# EAGLE board rs232 (EAGLE 4.16)

Size 160 x 100 mm. Coordinates in mm from the lower left corner, seen from the top.
Outline: 0,0 160,0 160,100 0,100 0,0
Copper layers (1*16): Top 0.035mm / dielectric 1.5mm / Bottom 0.035mm
Design rules "default": minimum track width 10mil, minimum drill 24mil, track to track 8mil, track to pad 8mil, pad to pad 8mil, via to via 8mil, smd to smd 8mil, copper to edge 40mil, drill to drill 8mil, minimum pad ring 10mil, minimum via ring 8mil, stop-mask expansion 4mil, vias tented up to drill 0mil, thermal gap 10mil

## Footprints (pad centres in the part's own frame; a part is rotated, then mirrored left to right if it is on the bottom)
C0805K = smd 1.3 x 1.6: 1 -1,0; 2 1,0
PANASONIC_B = smd 2.2 x 1.4: + 1.6,0; - -1.6,0
SO16 = smd 0.66 x 2.032: 1 -4.445,-3.073; 2 -3.175,-3.073; 3 -1.905,-3.073; 4 -0.635,-3.073; 5 0.635,-3.073; 6 1.905,-3.073; 7 3.175,-3.073; 8 4.445,-3.073; 9 4.445,3.073; 10 3.175,3.073; 11 1.905,3.073; 12 0.635,3.073; 13 -0.635,3.073; 14 -1.905,3.073; 15 -3.175,3.073; 16 -4.445,3.073
TQFP32-08 = smd 1.27 x 0.559: 1 -4.293,2.8; 2 -4.293,2; 3 -4.293,1.2; 4 -4.293,0.4; 5 -4.293,-0.4; 6 -4.293,-1.2; 7 -4.293,-2; 8 -4.293,-2.8; 17 4.293,-2.8; 18 4.293,-2; 19 4.293,-1.2; 20 4.293,-0.4; 21 4.293,0.4; 22 4.293,1.2; 23 4.293,2; 24 4.293,2.8 | smd 0.559 x 1.27: 9 -2.8,-4.293; 10 -2,-4.293; 11 -1.2,-4.293; 12 -0.4,-4.293; 13 0.4,-4.293; 14 1.2,-4.293; 15 2,-4.293; 16 2.8,-4.293; 25 2.8,4.293; 26 2,4.293; 27 1.2,4.293; 28 0.4,4.293; 29 -0.4,4.293; 30 -1.2,4.293; 31 -2,4.293; 32 -2.8,4.293
SO-08 = smd 0.6 x 2.2: 1 -1.905,-2.6; 2 -0.635,-2.6; 3 0.635,-2.6; 4 1.905,-2.6; 5 1.905,2.6; 6 0.635,2.6; 7 -0.635,2.6; 8 -1.905,2.6
LED3MM = drill 0.813 octagon: A -1.27,0; K 1.27,0
D_SUB_DON_SMD = smd 1.3 x 2.2: 1 10.26,-2.308; 2 7.52,-2.318; 3 4.78,-2.318; 4 2.04,-2.318; 5 -0.7,-2.318; 6 8.88,1.102; 7 6.14,1.102; 8 3.4,1.102; 9 0.66,1.102 | drill 2.2 round: P$1 -3.5,1.21 | drill 1.7 round: P$2 13.11,1.09
USB_4POL_PCB_FEMALE = drill 0.95 round: 1 0.03,2.69; 2 2.04,2.71; 3 4.06,2.69; 4 6.07,2.71 | hole 2.3: -2.16,0; 8.26,-0.07
MURATA_RESONATOR = smd 0.8 x 2.6: 1 -1.5,0; 2 0,0; 3 1.5,0
R0603 = smd 1 x 1.1: 1 -0.85,0; 2 0.85,0
TESTPAD = drill 1.321 pad 2.159 octagon: 1 0,0

## Placement (x,y rotation side)
C1  100n  [C0805K]  -62.87,89.37 0 top  (outside the outline)
C2  100n  [C0805K]  -73.03,89.37 0 top  (outside the outline)
C3  100n  [C0805K]  -83.19,89.37 0 top  (outside the outline)
C4  100n  [C0805K]  -93.35,89.37 0 top  (outside the outline)
C5  100n  [C0805K]  -103.51,89.37 0 top  (outside the outline)
C6  33n  [C0805K]  -113.67,89.37 0 top  (outside the outline)
C7  100n  [C0805K]  -123.83,89.37 0 top  (outside the outline)
C8  10u/16V  [PANASONIC_B]  -29.85,79.21 0 top  (outside the outline)
C9  100n  [C0805K]  -133.99,89.37 0 top  (outside the outline)
IC1  MAX232A  [SO16]  -85.73,8.09 0 top  (outside the outline)
IC2  FT232BL  [TQFP32-08]  -38.74,8.09 0 top  (outside the outline)
IC3  93LC66SN  [SO-08]  -144.15,69.05 0 top  (outside the outline)
LED1  [LED3MM]  -73.03,79.21 0 top  (outside the outline)
LED2  [LED3MM]  -45.09,79.21 0 top  (outside the outline)
LED3  [LED3MM]  -59.06,79.21 0 top  (outside the outline)
P1  D_SUB_9PIN_SMD  [D_SUB_DON_SMD]  -66.68,6.82 0 top  (outside the outline)
P3  [USB_4POL_PCB_FEMALE]  -24.77,11.9 0 top  (outside the outline)
Q1  [MURATA_RESONATOR]  -142.88,-5.88 0 top  (outside the outline)
R1  220R  [R0603]  -84.46,79.21 0 top  (outside the outline)
R2  220R  [R0603]  -95.89,79.21 0 top  (outside the outline)
R3  470R  [R0603]  -107.32,79.21 0 top  (outside the outline)
R4  27R  [R0603]  -118.75,79.21 0 top  (outside the outline)
R5  27R  [R0603]  -130.18,79.21 0 top  (outside the outline)
R6  1k5  [R0603]  -141.61,79.21 0 top  (outside the outline)
R7  4k7  [R0603]  -18.42,89.37 0 top  (outside the outline)
R8  220R  [R0603]  -29.85,89.37 0 top  (outside the outline)
R9  2k2  [R0603]  -41.28,89.37 0 top  (outside the outline)
R10  10k  [R0603]  -52.71,89.37 0 top  (outside the outline)
U$45  TESTPAD  [TESTPAD]  -117.48,69.05 0 top  (outside the outline)

## Library data of the parts
C1-C9 R1-R10 = rcl
IC1 IC2 P1 P3 Q1 U$45 = sc-librari
IC3 = microchip
LED1-LED3 = led

## Nets
0V: C4.2 C6.1 C7.1 C8.+ C9.2 IC2.9 IC2.17 IC2.18 IC2.19 IC2.20 IC2.22 IC2.29 IC2.31 IC3.5 P3.4 Q1.2 R8.1
GND: C3.2 IC1.8 IC1.10 IC1.15 P1.5
N$1: IC2.12 R1.1
N$2: IC1.13 P1.3
N$3: IC2.11 R2.1
N$4: IC2.1 IC3.2
N$5: LED2.K R1.2
N$6: LED3.K R2.2
N$7: C6.2 IC2.6
N$8: C7.2 IC2.30 R3.1
N$9: IC2.8 R4.2
N$10: P3.2 R4.1
N$11: IC2.7 R5.2 R6.1
N$12: P3.3 R5.1
N$13: IC2.5 R6.2
N$14: IC2.4 R7.2
N$16: IC2.32 IC3.1
N$17: C8.- LED1.A
N$18: IC2.27 Q1.3
N$19: IC2.28 Q1.1
N$21: IC2.2 IC3.3 R9.2
N$22: IC1.12 IC2.24
N$23: IC1.11 IC2.25
N$24: IC1.14 P1.2
N$25: IC3.4 R9.1 R10.1
N$26: LED1.K R8.2
N$33: IC1.7
N$34: IC1.9
N$36: C2.2 IC1.5
N$37: C1.1 IC1.1
N$38: C1.2 IC1.3
N$40: C5.1 IC1.2
N$41: C3.1 IC1.6
N$46: C2.1 IC1.4
VCC: C4.1 C5.2 C9.1 IC1.16 IC2.3 IC2.13 IC2.14 IC2.26 IC3.6 IC3.8 LED2.A LED3.A P3.1 R3.2 R7.1 R10.2 U$45.1

## Tracks (layer width: path | path; a pad name or v marks a point on that pad's centre or on a via)
0V  (16 unrouted)
GND  (4 unrouted)
N$1  (1 unrouted)
N$2  (1 unrouted)
N$3  (1 unrouted)
N$4  (1 unrouted)
N$5  (1 unrouted)
N$6  (1 unrouted)
N$7  (1 unrouted)
N$8  (2 unrouted)
N$9  (1 unrouted)
N$10  (1 unrouted)
N$11  (2 unrouted)
N$12  (1 unrouted)
N$13  (1 unrouted)
N$14  (1 unrouted)
N$16  (1 unrouted)
N$17  (1 unrouted)
N$18  (1 unrouted)
N$19  (1 unrouted)
N$21  (2 unrouted)
N$22  (1 unrouted)
N$23  (1 unrouted)
N$24  (1 unrouted)
N$25  (2 unrouted)
N$26  (1 unrouted)
N$36  (1 unrouted)
N$37  (1 unrouted)
N$38  (1 unrouted)
N$40  (1 unrouted)
N$41  (1 unrouted)
N$46  (1 unrouted)
VCC  (16 unrouted)